# Altium PCB partes_proyecto_.PcbDoc
Units mm, origin at the board's own origin, x right, y up, seen from the top; angles counter-clockwise.
Board outline 120 x 101.6 mm, 2 copper layers (Top Layer, Bottom Layer), stack 1.569 mm thick; 52 components, 65 nets, 235 pads, 0 vias.
Unrouted connection lines stored in the file: 168.
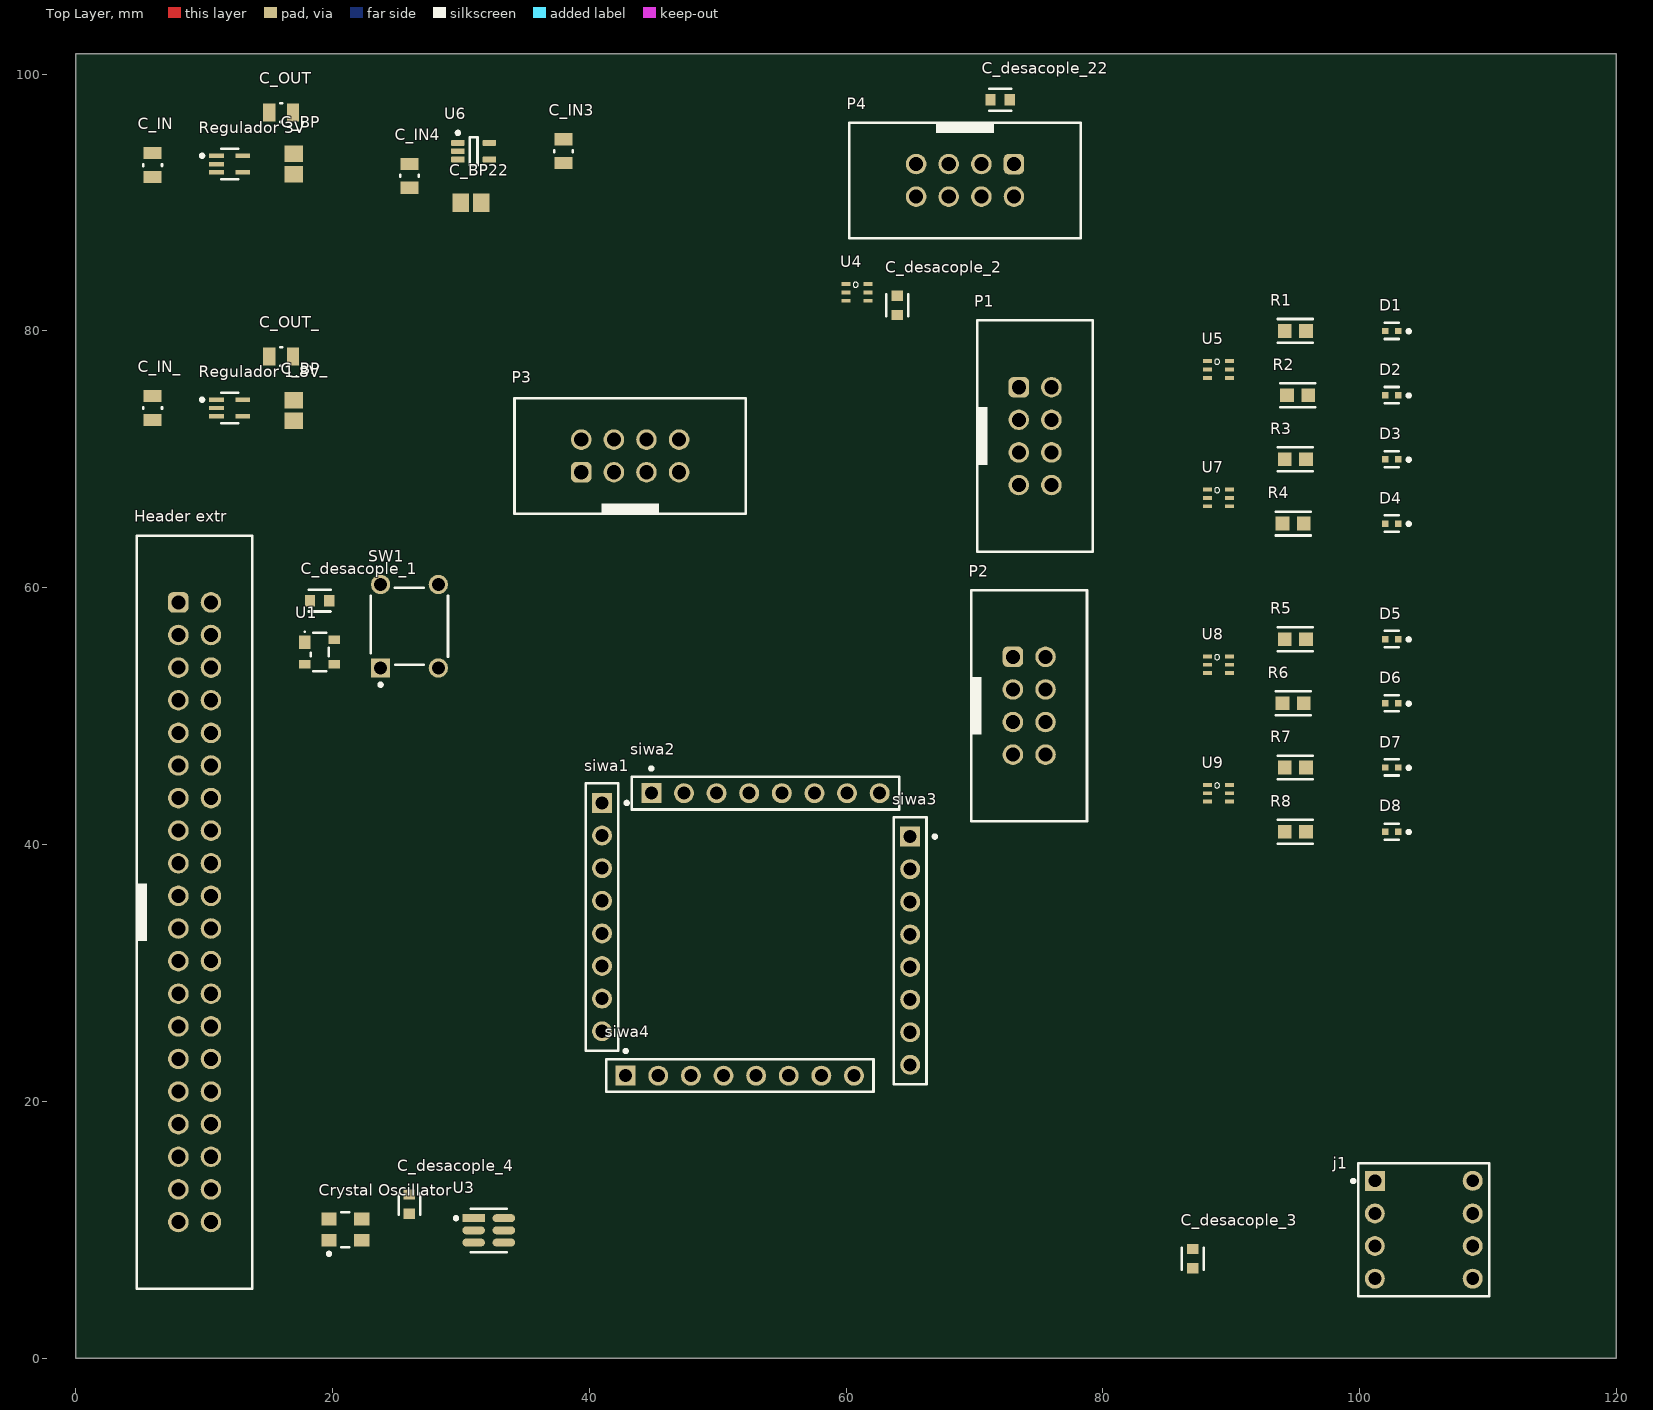
[diagram p0: Top Layer view]
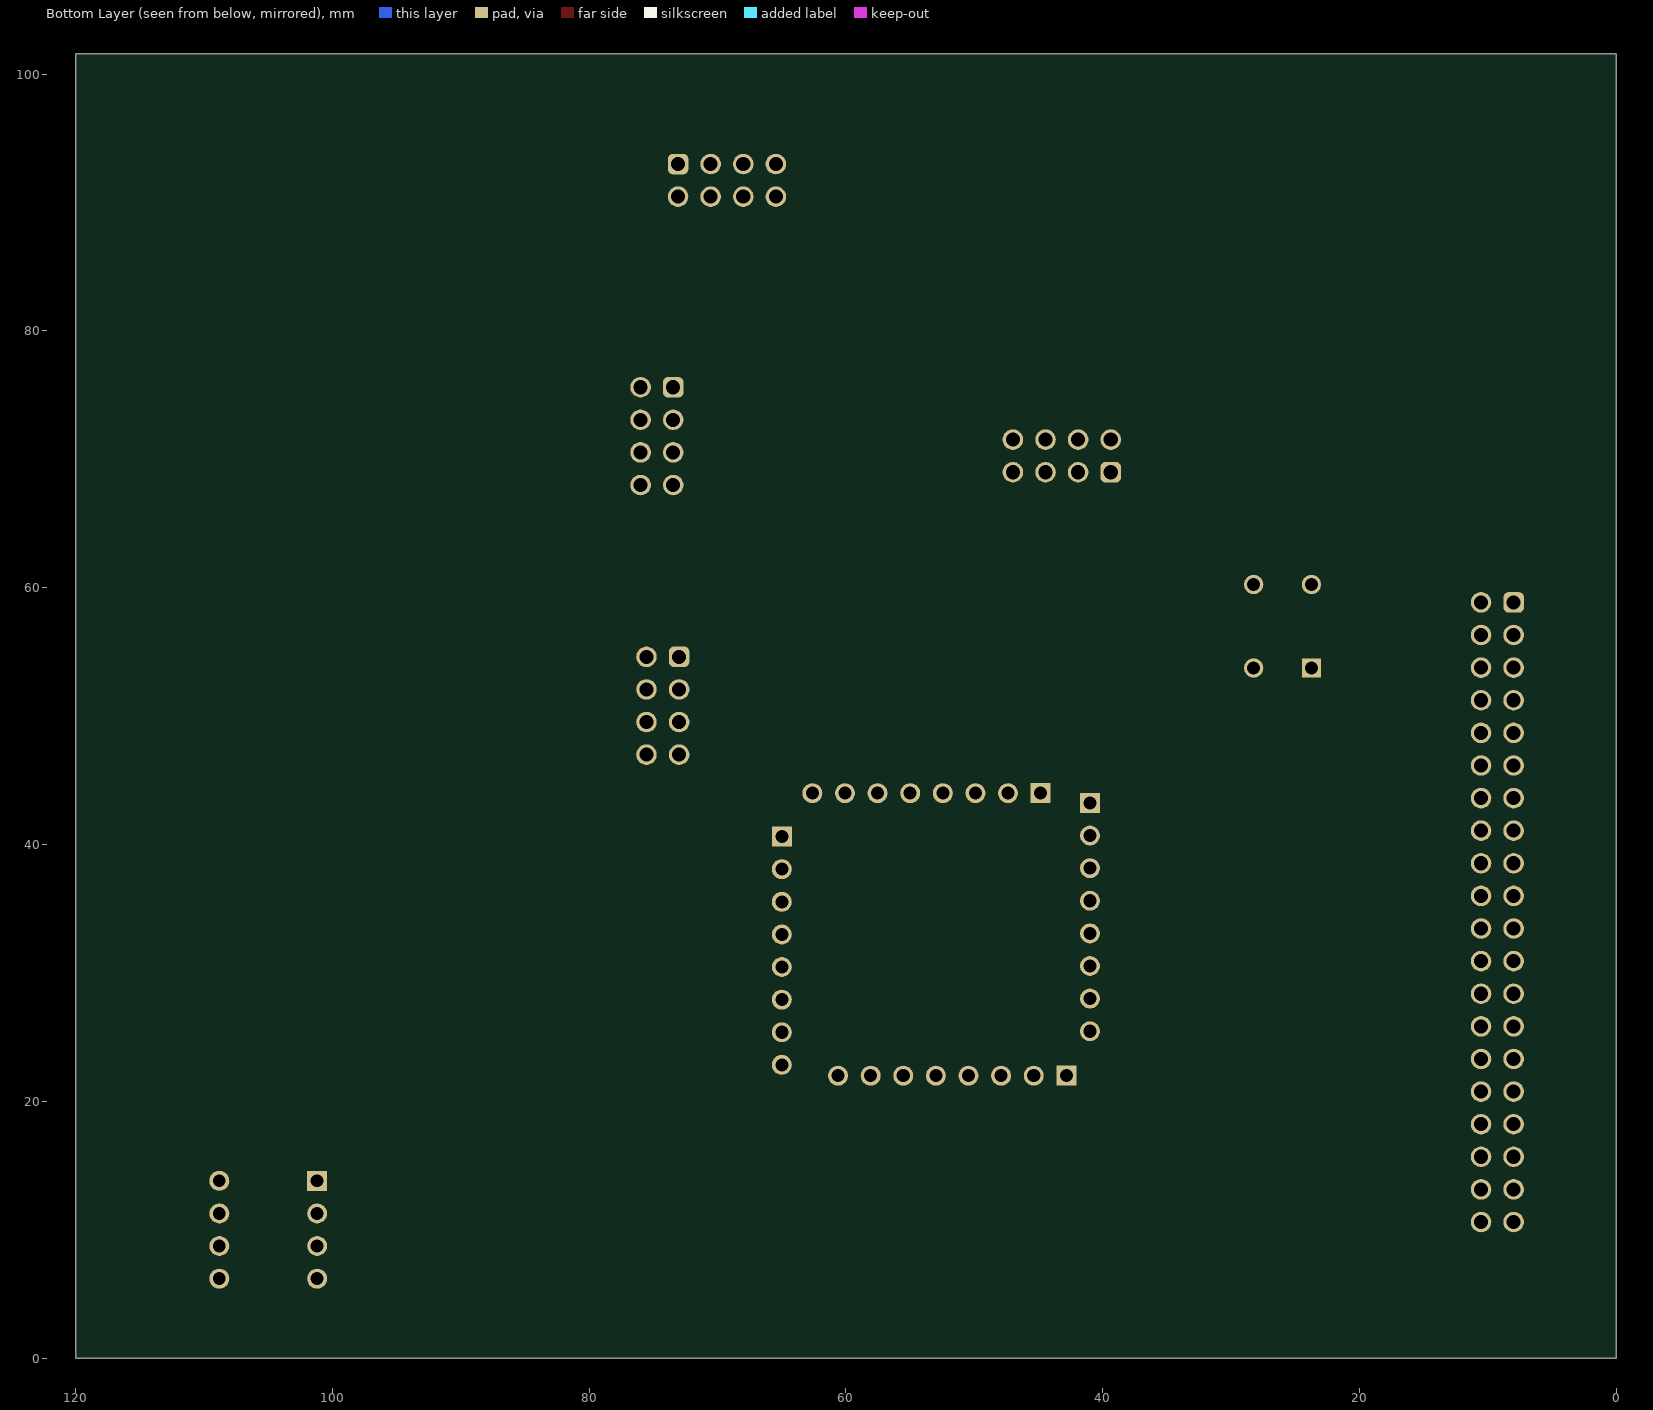
[diagram p1: Bottom Layer view, seen from below]

## Layer stack, top to bottom
Top Solder: solder mask 0.0254, SM-001, Dk 4
Top Layer: signal copper 0.035
Dielectric 1: core 1.4986, Core-043, Dk 4.3
Bottom Layer: signal copper 0.035
Bottom Solder: solder mask 0.0254, SM-001, Dk 4

## Board outline
0,0 120,0 120,101.6 0,101.6

## Design rules (kind name [scope] priority, off if disabled: settings)
Clearance Clearance_1 [OnMid vs OnMid] p1: gap=0.25 ignorepadtopadclearanceinfootprint=FALSE sourcerule=38 cellrowname=All cellrowtype=0 cellcolname=All cellcoltype=0 innerlayers=TRUE
Clearance Clearance_2 [(ExistsOnLayer('Top Layer') Or ExistsOnLayer('Bottom Layer')) vs (ExistsOnLayer('Top Layer') Or ExistsOnLayer('Bottom Layer'))] p2: gap=0.25 ignorepadtopadclearanceinfootprint=FALSE sourcerule=38 cellrowname=All cellrowtype=0 cellcolname=All cellcoltype=0 outerlayers=TRUE
Clearance [All] p3: gap=0.254 ignorepadtopadclearanceinfootprint=FALSE ismatrix=TRUE
PolygonConnect [All] p1: connectstyle=Relief reliefconductorwidth=0.254 reliefentries=4 polygonreliefangle="90 Angle" airgapwidth=0.254
RoutingVias [All] p1: holewidth=0.6 width=1 viastyle="Through Hole" minholewidth=0.6 minwidth=1 maxholewidth=0.6 maxwidth=1
SolderMaskExpansion [All] p1: expansion=0.102 istentingtop=FALSE
SupplyNets "Schematic Supply Nets" [InNet('GND')] p1: voltage=0.000
Width "Schematic Width Constraint" [InNetClass('Power')] p1: maxlimit=0.5 minlimit=0.25 preferedwidth=0.5 minimp=50.000000 maximp=50.000000 favimp=50.000000
Width [All] p2: maxlimit=0.25 minlimit=0.2 preferedwidth=0.25 minimp=50.000000 maximp=50.000000 favimp=50.000000
30 further rules are at their usual default settings.

## Classes and differential pairs
net class Power: "Alimentación 1.8V" "Alimentación 1V" "Alimentación 3V" "Alimentación externa de 1.8V" "Alimentación externa de 1V" "Alimentación externa de 3V" "Fuente 3.3V" "Salida de regulador de 1.8V" "Salida de regulador de 1V" "Salida de regulador de 3V"

## Components (designator, comment, footprint, x,y, rotation, side; value= is the part's Value field where it differs from the comment)
C_BP "10nF" CAPC2013X100X50NL20T25 17,93 r90 top
C_BP22 "10nF" CAPC2013X100X50NL20T25 30.8,90 r0 top
C_BP_ "10nF" CAPC2013X100X50NL20T25 17,73.8 r90 top
C_desacople_1 "CC0603KRX7R7BB104" FP-CC0603-DA-MFG 19,59 r180 top value="100 nF"
C_desacople_2 "CC0603KRX7R7BB104" FP-CC0603-DA-MFG 64,82 r270 top value="100 nF"
C_desacople_3 "CC0603KRX7R7BB104" FP-CC0603-DA-MFG 87,7.75 r90 top value="100 nF"
C_desacople_4 "CC0603KRX7R7BB104" FP-CC0603-DA-MFG 26,12 r270 top value="100 nF"
C_desacople_22 "CC0603KRX7R7BB104" FP-CC0603-DA-MFG 72,98 r180 top value="100 nF"
C_IN "1uF" FP-CC0805-0_85-MFG 6,92.925 r90 top value="1 uF"
C_IN3 "1uF" FP-CC0805-0_85-MFG 38,94 r270 top value="1 uF"
C_IN4 "1uF" FP-CC0805-0_85-MFG 26,92.075 r270 top value="1 uF"
C_IN_ "CC0805KKX7R7BB105" FP-CC0805-0_85-MFG 6,74 r270 top value="1 uF"
C_OUT "1uF" FP-CC0805-0_85-MFG 16,97 r180 top value="1 uF"
C_OUT_ "1uF" FP-CC0805-0_85-MFG 16,78 r180 top value="1 uF"
"Crystal Oscillator" "ASE3-20.000MHZ-KT" FP-ASE3-MFG 21,10 r0 top
D1 "QBLP595-IB" FP-QBLP595-IB-MFG 102.5,80 r180 top
D2 "QBLP595-IB" FP-QBLP595-IB-MFG 102.5,75 r180 top
D3 "QBLP595-IB" FP-QBLP595-IB-MFG 102.5,70 r180 top
D4 "QBLP595-IB" FP-QBLP595-IB-MFG 102.5,65 r180 top
D5 "QBLP595-IB" FP-QBLP595-IB-MFG 102.5,56 r180 top
D6 "QBLP595-IB" FP-QBLP595-IB-MFG 102.5,51 r180 top
D7 "QBLP595-IB" FP-QBLP595-IB-MFG 102.5,46 r180 top
D8 "QBLP595-IB" FP-QBLP595-IB-MFG 102.5,41 r180 top
"Header extr" "61204021621" 61204021621 9.27,34.73 r270 top
j1 "1-2199298-2" FP-1-2199298-2-MFG 105,10 r270 top
P1 "61200821621" 61200821621 74.73,71.81 r270 top
P2 "61200821621" 61200821621 74.27,50.81 r270 top
P3 "61200821621" 61200821621 43.19,70.27 r0 top
P4 "61200821621" 61200821621 69.27,91.73 r180 top
R1 "10" FP-MCT0603-IPC_A 95,80 r180 top
R2 "10" FP-MCT0603-IPC_A 95.171,75 r180 top
R3 "10" FP-MCT0603-IPC_A 95,70 r180 top
R4 "10" FP-MCT0603-IPC_A 94.829,65 r180 top
R5 "10" FP-MCT0603-IPC_A 95,56 r180 top
R6 "10" FP-MCT0603-IPC_A 94.829,51 r180 top
R7 "10" FP-MCT0603-IPC_A 95,46 r180 top
R8 "10" FP-MCT0603-IPC_A 95,41 r180 top
"Regulador 1.8V" "MAX8510EXK18+T" FP-X5-1-MFG 12,74 r0 top
"Regulador 3V" "MAX8510EXK30+T" FP-X5-1-MFG 12,93 r0 top
siwa1 "PPPC081LFBN-RC" SLIN-PPPC081LFBN-RC_V 41,34.35 r270 top
siwa2 "PPPC081LFBN-RC" SLIN-PPPC081LFBN-RC_V 53.73,44 r0 top
siwa3 "PPPC081LFBN-RC" SLIN-PPPC081LFBN-RC_V 65,31.73 r270 top
siwa4 "PPPC081LFBN-RC" SLIN-PPPC081LFBN-RC_V 51.73,22 r0 top
SW1 "B3F-1000" OMRON-B3F-1000-4_V 26,57 r90 top
U1 "APX812-29UG7" APX812-29UG7 19,55 r0 top
U3 "PL133-37TI-R" FP-SOT23-6LD-PL-1-IPC_A 32.175,9.95 r0 top
U4 "74LVC2G17GW,125" SOT363_INFINEON 60.85,83 r270 top
U5 "74LVC2G17GW,125" SOT363_INFINEON 89,77 r270 top
U6 "TPS71710DCKT" DCK0005A_M 31,94 r0 top
U7 "74LVC2G17GW,125" SOT363_INFINEON 89,67 r270 top
U8 "74LVC2G17GW,125" SOT363_INFINEON 89,54 r270 top
U9 "74LVC2G17GW,125" SOT363_INFINEON 89,44 r270 top

## Footprints (in the part's own frame and the unit in brackets; to place one, negate y for a bottom-side part, rotate by r counter-clockwise, add the part's x,y. Pads: shape width x height; smd on the part's side, far side on the other; paste and mask are expansions set on the pad)
61200821621 [mm] "8 pins, straight, gold plating"
  rrect50% 1.6x1.6 hole 1.1: 1(-3.81,-1.27)
  round 1.6 hole 1.1: 2(-3.81,1.27) 3(-1.27,-1.27) 4(-1.27,1.27) 5(1.27,-1.27) 6(1.27,1.27) 7(3.81,-1.27) 8(3.81,1.27)
  silkscreen extent -9.01,-4.5 9.01,4.5, body extent -8.91,-4.42 8.91,4.75, height 9.13
61204021621 [mm] "40 pins, straight, gold plating"
  rrect50% 1.6x1.6 hole 1.1: 1(-24.13,-1.27)
  round 1.6 hole 1.1: 2(-24.13,1.27) 3(-21.59,-1.27) 4(-21.59,1.27) 5(-19.05,-1.27) 6(-19.05,1.27) 7(-16.51,-1.27) 8(-16.51,1.27) 9(-13.97,-1.27) 10(-13.97,1.27) 11(-11.43,-1.27) 12(-11.43,1.27) 13(-8.89,-1.27) 14(-8.89,1.27) 15(-6.35,-1.27) 16(-6.35,1.27) 17(-3.81,-1.27) 18(-3.81,1.27) 19(-1.27,-1.27) 20(-1.27,1.27) 21(1.27,-1.27) 22(1.27,1.27) 23(3.81,-1.27) 24(3.81,1.27) 25(6.35,-1.27) 26(6.35,1.27) 27(8.89,-1.27) 28(8.89,1.27) 29(11.43,-1.27) 30(11.43,1.27) 31(13.97,-1.27) 32(13.97,1.27) 33(16.51,-1.27) 34(16.51,1.27) 35(19.05,-1.27) 36(19.05,1.27) 37(21.59,-1.27) 38(21.59,1.27) 39(24.13,-1.27) 40(24.13,1.27)
  silkscreen extent -29.33,-4.5 29.33,4.5, body extent -29.23,-4.42 29.23,4.75, height 9.13
APX812-29UG7 [mm] "SOT143, 4-Leads, Body 2.90x2.38mm, Pitch 1.90mm, IPC Medium Density"
  rect 0.9x1.05 smd: 1(-1.15,0.75)
  rect 0.9x0.65 smd: 2(-1.15,-0.95) 3(1.15,-0.95) 4(1.15,0.95)
  silkscreen extent -1.2,-1.5 0.7,1.62, body extent -1.18,-1.5 1.18,1.5, height 1.1
CAPC2013X100X50NL20T25 [mm] "Chip Capacitor, 2-Leads, Body 2.00x1.25mm, IPC Medium Density"
  rect 1.3x1.45 smd: 1(-0.8,0) 2(0.8,0)
  body extent -1.1,-0.72 1.1,0.72, height 1
DCK0005A_M [mm] "SOT23, 5-Leads, Body 2.15x1.4mm, Pitch 0.65mm, IPC Low Density"
  rrect22% 1.05x0.45 smd: 1(-1.225,0.65) 2(-1.225,0) 3(-1.225,-0.65) 4(1.225,-0.65) 5(1.225,0.65)
  silkscreen extent -1.35,-1.1 0.3,1.55, body extent -1.14,-1 1.14,1, height 0.94
FP-1-2199298-2-MFG [mm]
  rect 1.55x1.55 hole 1 paste-2539.97 mask+0: 1(-3.81,-3.81)
  round 1.55 hole 1 paste-2539.97 mask+0: 2(-1.27,-3.81) 3(1.27,-3.81) 4(3.81,-3.81) 5(3.81,3.81) 6(1.27,3.81) 7(-1.27,3.81) 8(-3.81,3.81)
  silkscreen extent -5.18,-5.61 5.18,5.1, body extent -5.28,-5.2 5.28,5.2, height 0.25
FP-ASE3-MFG [mm]
  rect 1.2x1 smd paste+0 mask+0: 1(-1.27,-0.825) 2(1.27,-0.825) 3(1.27,0.825) 4(-1.27,0.825)
  silkscreen extent -1.39,-2 0.3,1.35, body extent -1.97,-1.45 1.97,1.45, height 0.25
FP-CC0603-DA-MFG [mm]
  rect 0.8x0.9 smd paste+0 mask+0: 1(-0.75,0) 2(0.75,0)
  silkscreen extent -0.85,-0.85 0.85,0.85, body extent -1.35,-0.75 1.35,0.75, height 0.25
FP-CC0805-0_85-MFG [mm]
  rect 0.95x1.4 smd paste+0 mask+0: 1(-0.925,0) 2(0.925,0)
  silkscreen extent -0.08,-0.72 0.08,0.72, body extent -1.6,-1.05 1.6,1.05, height 0.25
FP-MCT0603-IPC_A [mm]
  rect 1.064x1.062 smd paste+0 mask+0: 1(-0.829,0) 2(0.829,0)
  silkscreen extent -1.36,-0.93 1.36,0.93, body extent -1.86,-1.03 1.86,1.03, height 0.25
FP-QBLP595-IB-MFG [mm]
  rect 0.5x0.5 smd paste+0 mask+0: 1(-0.5,0) 2(0.5,0)
  silkscreen extent -1.45,-0.63 0.55,0.63, body extent -0.85,-0.4 0.85,0.4, height 0.25
FP-SOT23-6LD-PL-1-IPC_A [mm]
  rect 1.755x0.616 smd paste+0 mask+0: 1(-1.175,0.95)
  rrect100% 1.755x0.616 smd paste+0 mask+0: 2(-1.175,0) 3(-1.175,-0.95) 4(1.175,-0.95) 5(1.175,0) 6(1.175,0.95)
  silkscreen extent -2.68,-1.7 1.4,1.7, body extent -2.55,-1.95 2.55,1.95, height 0.25
FP-X5-1-MFG [mm]
  rect 1.15x0.35 smd paste+0 mask+0: 1(-1.025,0.65) 2(-1.025,0) 3(-1.025,-0.65) 4(1.025,-0.65) 5(1.025,0.65)
  silkscreen extent -2.27,-1.2 0.67,1.2, body extent -1.7,-1.2 1.7,1.2, height 0.25
OMRON-B3F-1000-4_V [mm] "TH, 4-Leads, Body 6x6mm"
  rect 1.5x1.5 hole 1 paste-2539.97: 1(-3.25,2.25)
  round 1.5 hole 1 paste-2539.97: 2(3.25,2.25) 4(3.25,-2.25)
  round 1.5 hole 1 paste-2539.97 mask+0.102: 3(-3.25,-2.25)
  silkscreen extent -4.67,-3 3,3, body extent -3,-3 3,3, height 4.5
SLIN-PPPC081LFBN-RC_V [mm] "THD, 8-Leads, Body 20.82x2.54mm, Pitch 2.54mm"
  rect 1.55x1.55 hole 1.02: 1(-8.89,0)
  round 1.55 hole 1.02: 2(-6.35,0) 3(-3.81,0) 4(-1.27,0) 5(1.27,0) 6(3.81,0) 7(6.35,0) 8(8.89,0)
  silkscreen extent -10.41,-1.27 10.41,2.05, body extent -10.41,-1.27 10.41,1.27, height 8.5
SOT363_INFINEON [mm]
  rect 0.3x0.7 smd: 1(-0.65,-0.85) 2(0,-0.85) 3(0.65,-0.85) 4(0.65,0.85) 5(0,0.85) 6(-0.65,0.85)
  silkscreen extent -0.8,-0.3 -0.4,0.1, body extent -1,-1.05 1,1.05, height 1.1

## Part data
C_BP C_BP22 C_BP_: library part CMP-2007-03708-1, Manufacturer=Kemet, Part Number=C0805F103K5RACTU
C_desacople_1 C_desacople_2 C_desacople_3 C_desacople_4 C_desacople_22: library part CMP-2000-05002-2, "CAP CER 0.1UF 16V X7R 0603", Capacitance="100 nF", Manufacturer=YAGEO, Package=CC0603-DA, Temperature="-55°C to +125°C", Temperature Characteristic=X7R, Temperature Coefficient=15%, Temperature Range High=+125°C, Temperature Range Low=-55°C, Tolerance=0.1, Voltage="16 V", Automotive=No, Category=Cap, ComponentLink2Description=Datasheet, ComponentLink2URL=http://www.yageo.com/documents/recent/UPY-GPHC_X7R_6.3V-to-50V_18.pdf, Device Class L1="Passive Components", Device Class L2=Capacitors, Device Class L3="Ceramic Capacitors", Digikey Description="CAP CER 0.1UF 16V X7R 0603", Footprint Url=http://www.yageo.com/exep/pages/download/literatures/UPY-C_GEN_24.pdf, Height=0.9mm, Lead Free=Yes, Manufacturer Part Number=CC0603KRX7R7BB104, Material=Ceramic, Mouser Description="Multilayer Ceramic Capacitor, CC Series, 0.1 - F, - 10%, X7R, 16 V, 0603 [1608 Metric]", Octopart=https://octopart.com/cc0603krx7r7bb104-yageo-192941, RoHS=TRUE, Voltage Rating="16 V"
C_IN C_IN3 C_IN4 C_OUT C_OUT_: library part CMP-03422-000001-1, "CAP CER 1UF 16V X7R 0805", Capacitance="1 uF", Manufacturer=Yageo, Manufacturer Part Number=CC0805KKX7R7BB105, Package=CC0805-0.85, Temperature="-30°C to +85°C", Temperature Characteristic=X7R, Temperature Range High=+85°C, Temperature Range Low=-30°C, Tolerance=0.1, Voltage Rating="16 V", Automotive=No, Category=Cap, ComponentLink2Description=Datasheet, ComponentLink2URL=http://www.yageo.com/documents/recent/UPY-GPHC_Y5V_6.3V-to-50V_8.pdf, Device Class L1="Passive Components", Device Class L2=Capacitors, Device Class L3="Ceramic Capacitors", Digikey Description="CAP CER 1UF 16V X7R 0805", Footprint Url=http://www.yageo.com/exep/pages/download/literatures/UPY-C_GEN_24.pdf, Height=0.95mm, Ipc Land Pattern Name=CAPC200125X85, Lead Free=Yes, Material=Ceramic, Mouser Description="Multilayer Ceramic Capacitors MLCC - SMD/SMT 1.0uF 16V X7R 10%", Octopart=https://octopart.com/cc0805kkx7r7bb105-yageo-8376555, RoHS=TRUE
C_IN_: library part CMP-03422-000001-1, "CAP CER 1UF 16V X7R 0805", Capacitance="1 uF", Manufacturer=Yageo, Package=CC0805-0.85, Temperature="-30°C to +85°C", Temperature Characteristic=X7R, Temperature Range High=+85°C, Temperature Range Low=-30°C, Tolerance=0.1, Voltage Rating="16 V", Automotive=No, Category=Cap, ComponentLink2Description=Datasheet, ComponentLink2URL=http://www.yageo.com/documents/recent/UPY-GPHC_Y5V_6.3V-to-50V_8.pdf, Device Class L1="Passive Components", Device Class L2=Capacitors, Device Class L3="Ceramic Capacitors", Digikey Description="CAP CER 1UF 16V X7R 0805", Footprint Url=http://www.yageo.com/exep/pages/download/literatures/UPY-C_GEN_24.pdf, Height=0.95mm, Ipc Land Pattern Name=CAPC200125X85, Lead Free=Yes, Manufacturer Part Number=CC0805KKX7R7BB105, Material=Ceramic, Mouser Description="Multilayer Ceramic Capacitors MLCC - SMD/SMT 1.0uF 16V X7R 10%", Octopart=https://octopart.com/cc0805kkx7r7bb105-yageo-8376555, RoHS=TRUE
"Crystal Oscillator": library part CMP-27762-010045-1, "XTAL OSC XO 20.0000MHZ CMOS SMD", Case/Package=SMD/SMT, Frequency=20MHz, Frequency Stability=30ppm, Load Capacitance=15pF, Max Operating Temperature=70°C, Max Supply Current=4mA, Max Supply Voltage=1.89V, Min Operating Temperature=-10°C, Min Supply Voltage=1.71V, Operating Supply Voltage=1.8V, Package Quantity=1000, Depth=2.5mm, Height=0.049inch, Lead Free="Lead Free", Length=3.2mm, Mount="Surface Mount", Number of Pins=4, Packaging="Tape and Reel", Radiation Hardening=No, Series=ASE3, Termination=SMD/SMT, Width=0.098inch
D1 D2 D3 D4 D5 D6 D7 D8: library part CMP-113271-000002-1, "LED BLUE CLEAR 0402 SMD", Case Code (Imperial)=0402, Case Code (Metric)=1005, Color=Blue, Forward Voltage=3.1V, Lens Color=Colorless, Test Current=20mA, Case/Package=0402, Dominant Wavelength=465nm, Height=0.6mm, Length=1mm, Lens Size=0.5mm, Lens Style=Flat, Lens Transparency=Clear, Luminous Intensity=85mcd, Mount="Surface Mount", Packaging="Tape and Reel", Viewing Angle=140°, Width=0.5mm
"Header extr": library part CMP-1502-00015-3, Color=Black, Contact Resistance=20mΩ, Current Rating=3A, Insulation Resistance=1GΩ, Max Operating Temperature=105°C, Min Operating Temperature=-40°C, Operating Supply Voltage=250V, Connector Type="Male Pin", Contact Material=Copper, Contact Plating=Gold, Gender=Male, Height=9.25mm, Insulation Material=PBT, Lead Pitch=2.54mm, Length=58.46mm, Mount="Through Hole", NexarPartId=25903616, Number of Contacts=40, Number of Pins=40, Number of Positions=40, Number of Rows=2, Orientation=Vertical, Pitch=2.54mm, REACH SVHC=Unknown, RoHS=Compliant, Row Spacing=2.54mm, Termination=Solder, Voltage Rating=250V
j1: library part CMP-03370-000009-1, "CONN IC DIP SOCKET 8POS TIN", Color=Black, Contact Current Rating=1A, Contact Resistance=20mR, Flammability Rating="UL94 V-0", Insulation Resistance=1GR, Max Operating Temperature=105°C, Min Operating Temperature=-40°C, Package Quantity=60, Connector Type=Pin, Contact Finish - Mating=TIN, Contact Material=Bronze, Contact Plating=Tin, Contact Post Length=3inch, ELV=Compliant, Housing Material=PBT, Lead Free="Lead Free", Lead Pitch=2.54mm, Length=0.4inch, Mating Alignment="Yes (With)", Mount="Through Hole", Number of Contacts=8, Number of Positions=8, Number of Rows=2, Orientation=Straight, Packaging=Rail/Tube, Pitch=2.54mm, Radiation Hardening=No, RoHS Compliant=Yes, Row Spacing=0.3inch, Series="Diplomate DL", Termination="Through Hole"
P1 P2 P3 P4: library part CMP-1502-00006-2, Color=Black, Contact Resistance=20mΩ, Current Rating=3A, Insulation Resistance=1GΩ, Max Operating Temperature=105°C, Min Operating Temperature=-40°C, Operating Supply Voltage=250V, Connector Type="Male Pin", Contact Material=Copper, Contact Plating=Gold, Gender=Male, Insulation Material=PBT, Lead Pitch=2.54mm, Length=17.82mm, Mount="Through Hole", NexarPartId=32855460, Number of Contacts=8, Number of Pins=8, Number of Positions=8, Number of Rows=2, Orientation=Vertical, Pitch=2.54mm, REACH SVHC=Unknown, RoHS=Compliant, Row Spacing=2.54mm, Termination=Solder
R1 R2 R3 R4 R5 R6 R7 R8: library part CMP-02407-011165-1, "RES SMD 100 OHM 1% 1/8W 0603", Case Code (Imperial)=0603, Case Code (Metric)=1608, Max Operating Temperature=155°C, Max Power Dissipation=125mW, Min Operating Temperature=-55°C, Package Quantity=1000, Resistance=20kR, Resistor Type="Thin Film", Temperature Coefficient=25ppm/°C, Tolerance=0.1%, Voltage Rating=75V, Case/Package=0603, Construction=Rectangular, Depth=0.85mm, Features="Automotive AEC-Q200", Height=0.022inch, Length=1.55mm, Military Standard=Not, Number of Terminations=2, Packaging="Tape and Reel", Power Rating=125mW, Series="MCT 0603 - Precision", Termination=SMD/SMT, Weight=6.7E-05oz, Width=0.033inch
"Regulador 1.8V": library part CMP-0246-00401-2, "IC REG LINEAR 1.8V 120MA SC70-5", Case/Package=SC, Input Bias Current=40uA, Max Input Voltage=6V, Max Operating Temperature=85°C, Max Output Current=120mA, Max Power Dissipation=247mW, Min Current Limit=130mA, Min Input Voltage=2V, Min Operating Temperature=-40°C, Nominal Output Voltage=1.8V, Package Quantity=2500, Power Supply Rejection Ratio (PSRR)=54dB, Quiescent Current=90uA, Reference Voltage=1.225V, Accuracy=2%, Lead Free="Lead Free", Mount="Surface Mount", Number of Outputs=1, Number of Pins=5, Number of Regulators=1, Output Configuration=Positive, Output Current=120mA, Output Type=Fixed, Output Voltage=1.8V, Packaging="Tape and Reel", Polarity=Positive, RoHS Compliant=Yes, Series=-
"Regulador 3V": library part CMP-0246-00520-2, "IC REG LINEAR 3V 120MA SC70-5", Case/Package=SC, Dropout Voltage=120mV, Input Bias Current=40uA, Max Input Voltage=6V, Max Operating Temperature=85°C, Max Output Current=120mA, Max Power Dissipation=247mW, Min Current Limit=130mA, Min Input Voltage=2V, Min Operating Temperature=-40°C, Nominal Output Voltage=3V, Package Quantity=2500, Power Supply Rejection Ratio (PSRR)=54dB, Quiescent Current=90uA, Reference Voltage=1.225V, Accuracy=2%, Lead Free="Lead Free", Mount="Surface Mount", Number of Outputs=1, Number of Pins=5, Number of Regulators=1, Output Configuration=Positive, Output Current=120mA, Output Type=Fixed, Output Voltage=3V, Packaging="Tape and Reel", Polarity=Positive, Radiation Hardening=No, RoHS Compliant=Yes, Series=-
siwa1 siwa2 siwa3 siwa4: library part CMP-1770-00002-1, "Female Header, Pitch 2.54 mm, 1 x 8 Position, Height 8.5 mm, Tail Length 3.2 mm, -40 to 105 degC, RoHS, Bulk", Case\Package=TO-252-3, Input Capacitance="350 pF", Max Operating Temperature="150 degC", Max Power Dissipation="2.5 W", Min Operating Temperature="-55 degC", Package Quantity=2500, ComponentLink1Description=Datasheet, ComponentLink1URL=http://sullinscorp.com/catalogs/101_PAGE114-115_.100_FEMALE_HDR.pdf, DatasheetVersion=Jan-15, Elements=1, Height="2.39 mm", Length="6.73 mm", Mount="Surface Mount", PackageDescription="Female Header, Pitch 2.54 mm, 1 x 8 Position, Height 8.5 mm, Tail Length 3.2 mm", PackageReference=PPPC081LFBN-RC, Packaging="Tape and Reel", Pins=3, Radiation Hardening=No, Rds On Max="115 mohm", REACH SVHC="No SVHC", RoHSCompliant=true, Typical Rise Time="90 ns", Width="6.22 mm"
SW1: library part CMP-1677-00002-1, "Tactile Switch, SPST-NO, 0.05 A, 5 to 24 V, -25 to 70 degC, 4-Pin THD, RoHS, Bulk", Capacitance="-45 f", Current Rating="1.5 A", Max Operating Temperature="70 degC", Min Operating Temperature="-40 degC", Package Quantity=1080, Voltage Rating="150 V", ComponentLink1Description="Manufacturer URL", ComponentLink1URL=http://www.omron.com/, ComponentLink2Description=Datasheet, ComponentLink2URL=http://www.omron.com/ecb/products/pdf/en-b3f.pdf, Contact Material=Brass, Contact Plating=Gold, DatasheetVersion=Jan-15, Gender=Female, Height="14.99 mm", Lead Pitch="1.27 mm", Length="18.34 mm", Mount="Through Hole", PackageDescription="4-Pin Through Hole Device, Body 6 x 6 mm", PackageReference=B3F-1000, Packaging=Tray, Pins=8, Radiation Hardening=No, RoHSCompliant=true, Shielding=Shielded, Width="25.4 mm"
U1: "4-Pin Microprocessor Supervisor With Manual Reset. SOT143."
U3: library part CMP-06262-000018-1, "IC CLK BUFFER 1:3 150MHZ 6SOT23", Case/Package=SOT-23-6, Max Frequency=150MHz, Max Operating Temperature=85°C, Min Operating Temperature=-40°C, Package Quantity=3000, Input=LVCMOS, Lead Free="Lead Free", Mount="Surface Mount", Number of Circuits=1, Packaging="Cut Tape", RoHS Compliant=Yes, Series=-
U6: library part CMP-0394-00843-2, "Single Output High PSRR LDO, 150 mA, Fixed 1 V Output, 2.5 to 6.5 V Input, with Low IQ, 5-pin SC70 (DCK), -40 to 85 degC, Green (RoHS & no Sb/Br)", Manufacturer="Texas Instruments", Accuracy(%)=3, Code_JEDEC=MO-203, ComponentLink1Description="Manufacturer URL", ComponentLink1URL=http://www.ti.com/, ComponentLink2Description=Datasheet, ComponentLink2URL=http://www.ti.com/general/docs/lit/getliterature.tsp?genericPartNumber=TPS71710&fileType=pdf, ComponentLink3Description="Package Specification", ComponentLink3URL=http://www.ti.com/litv/pdf/mpds025f, DatasheetVersion=SBVS068G, Eco-Plan="Green (RoHS & no Sb/Br)", Fixed Output Options(V)=1, Iout(Max)(A)=0.15, Iq(Typ)(mA)=0.05, Mounting Technology="Surface Mount", PackageDescription="5-Pin Plastic Small-Outline, Body 2 x 1.25 mm, Pitch 0.65 mm", PackageReference=DCK0005A, PackageVersion=4093553-3/G, PartNumber=TPS71710DCKT, SubFamily="Single Channel LDO", Vdo(Typ)(mV)=170, Vin(Max)(V)=6.5, Vin(Min)(V)=2.5, Vout Adj(Max)(V)=1, Vout Adj(Min)(V)=1

## Nets (pads, with @x,y where several pads share a name; then routed paths per layer and width w, separated by ;. In a path a pad name is that pad's centre, name@x,y a point inside that pad or via, vN(x,y) a via of type N, cw(c..) or ccw(c..) an arc to the next point about the centre after c; other vN are vias at no path point)
"Alimentación 1.8V": C_desacople_3.2 j1.3 j1.7 j1.8 P3.8 siwa1.5 siwa2.4 siwa3.2 siwa4.5
"Alimentación 1V": P3.7 siwa1.2 siwa1.3 siwa2.6 siwa2.7 siwa3.7 siwa4.3
"Alimentación 3V": "Crystal Oscillator.1" "Crystal Oscillator.4" C_desacople_1.1 C_desacople_2.1 C_desacople_4.1 C_desacople_22.2 P3.2 P4.2 P4.3 P4.7 U1.4 U3.5 U4.5 U5.5 U7.5 U8.5 U9.5
"Alimentación externa de 1.8V": "Header extr.11"
"Alimentación externa de 1V": "Header extr.13"
"Alimentación externa de 3V": "Header extr.9"
CLK0: "Header extr.40" U3.4
CLK1: "Header extr.39" U3.1
"CLK de SIWA": "Header extr.38" siwa3.3
"Fuente 3.3V": "Regulador 1.8V.1" "Regulador 1.8V.3" "Regulador 3V.1" "Regulador 3V.3" C_IN4.1 C_IN.1 C_IN_.1 P3.6 U6.1 U6.3
GND: "Crystal Oscillator.2" "Header extr.3" "Regulador 1.8V.2" "Regulador 3V.2" C_BP22.1 C_desacople_1.2 C_desacople_2.2 C_desacople_3.1 C_desacople_4.2 C_desacople_22.1 C_IN3.2 C_IN4.2 C_IN.2 C_IN_.2 C_OUT.2 C_OUT_.2 D1.1 D2.1 D3.1 D4.1 D5.1 D6.1 D7.1 D8.1 j1.4 P3.4 P4.1 P4.4 siwa1.8 siwa2.1 siwa3.1 siwa4.1 SW1.4 U1.1 U3.2 U3.6 U4.2 U5.2 U6.2 U7.2 U8.2 U9.2
GPIO0: P1.1 siwa1.7 U4.1
GPIO0_B_LED: R1.1 U5.6
GPIO0_B_Pantalla: P4.5 U4.6
GPIO0_Salida_Header_1: P1.2 U5.1
GPIO1: P1.3 siwa1.6 U4.3
GPIO1_B_LED: R2.1 U5.4
GPIO1_Salida_Header_1: P1.4 U5.3
GPIO1B_Pantalla: P4.6 U4.4
GPIO2: P1.5 siwa1.4
GPIO2_B_LED: R3.1 U7.6
GPIO2_Salida_Header_1: P1.6 U7.1
GPIO3: P1.7 siwa1.1
GPIO3_B_LED: R4.1 U7.4
GPIO3_Salida_Header_1: P1.8 U7.3
GPIO4: P2.1 siwa2.2
GPIO4_B_LED: R5.1 U8.6
GPIO4_Salida_Header2: P2.2 U8.1
GPIO5: P2.3 siwa2.3
GPIO5_B_LED: R6.1 U8.4
GPIO5_Salida_Header2: P2.4 U8.3
GPIO6: P2.5 siwa2.5
GPIO6_B_LED: R7.1 U9.6
GPIO6_Salida_Header2: P2.6 U9.1
GPIO7: P2.7 siwa2.8
GPIO7_B_LED: R8.1 U9.4
GPIO7_Salida_Header2: P2.8 U9.3
MAIP: siwa3.5
MISO: j1.2 siwa4.8
MOSI: j1.5 siwa4.7
NC: "Header extr.1" "Header extr.2" "Header extr.4" "Header extr.8" "Header extr.10" "Header extr.12" "Header extr.14" "Header extr.15" "Header extr.16" "Header extr.17" "Header extr.18" "Header extr.19" "Header extr.20" "Header extr.21" "Header extr.22" "Header extr.23" "Header extr.24" "Header extr.25" "Header extr.26" "Header extr.27" "Header extr.28" "Header extr.29" "Header extr.30" "Header extr.31" "Header extr.32" "Header extr.33" "Header extr.34" "Header extr.35" "Header extr.36" "Header extr.37" P4.8
NetC_BP22_2: C_BP22.2 U6.4
NetC_BP_1: "Regulador 3V.4" C_BP.1
NetC_BP__1: "Regulador 1.8V.4" C_BP_.1
NetD1_2: D1.2 R1.2
NetD2_2: D2.2 R2.2
NetD3_2: D3.2 R3.2
NetD4_2: D4.2 R4.2
NetD5_2: D5.2 R5.2
NetD6_2: D6.2 R6.2
NetD7_2: D7.2 R7.2
NetD8_2: D8.2 R8.2
POC_CONTROL: siwa3.4
"RESET externo": "Header extr.7"
"RESET integrado": "Header extr.5" U1.2
"RESET SIWA": "Header extr.6" siwa3.6
"Salida de regulador de 1.8V": "Regulador 1.8V.5" C_BP_.2 C_OUT_.1 P3.5
"Salida de regulador de 1V": C_IN3.1 P3.3 U6.5
"Salida de regulador de 3V": "Regulador 3V.5" C_BP.2 C_OUT.1 P3.1
"Salida del interruptor": SW1.1 U1.3
"Salida oscilador": "Crystal Oscillator.3" U3.3
SCLK: j1.6 siwa4.6
"SCS SPI Chip Select": j1.1 siwa3.8
UART_RX: siwa4.4
UART_TX: siwa4.2
pads on no net: SW1.2 SW1.3